# Altium PCB Power Supply.PcbDoc (part 1 of 2)
Units mm, origin at the board's own origin, x right, y up, seen from the top; angles counter-clockwise.
Board outline 95 x 55 mm, 2 copper layers (Top Layer, Bottom Layer); 70 components, 47 nets, 218 pads, 358 vias.
Unrouted connection lines stored in the file: 83.
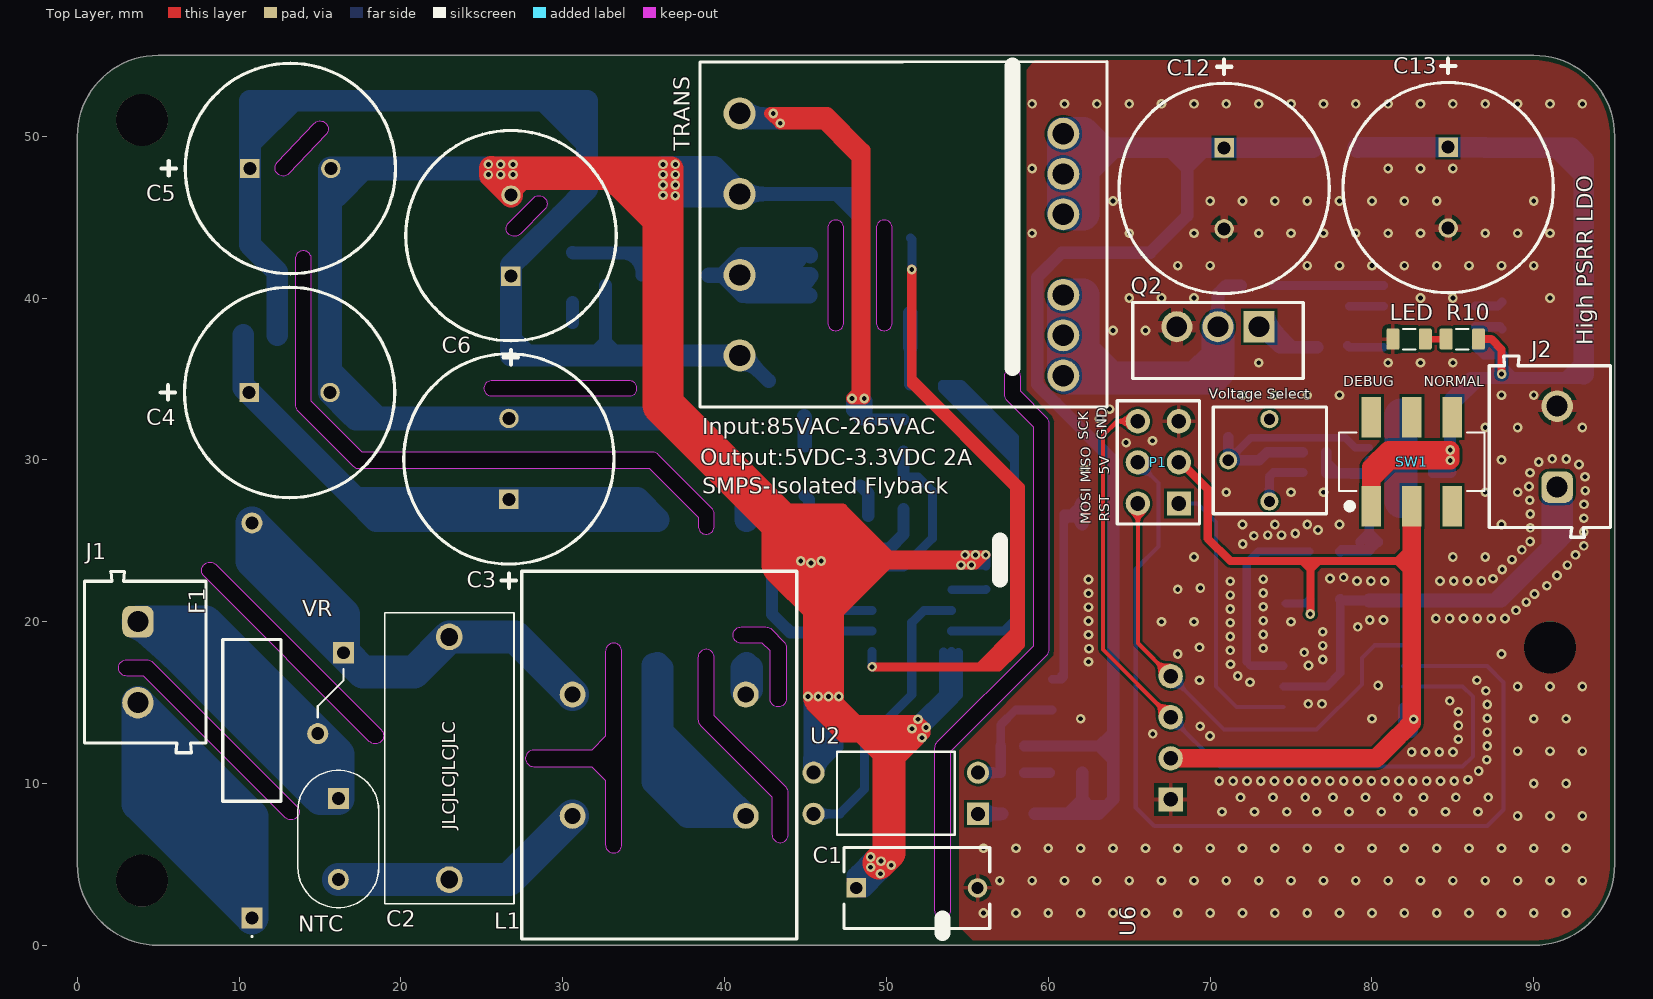
[diagram p0: Top Layer view]
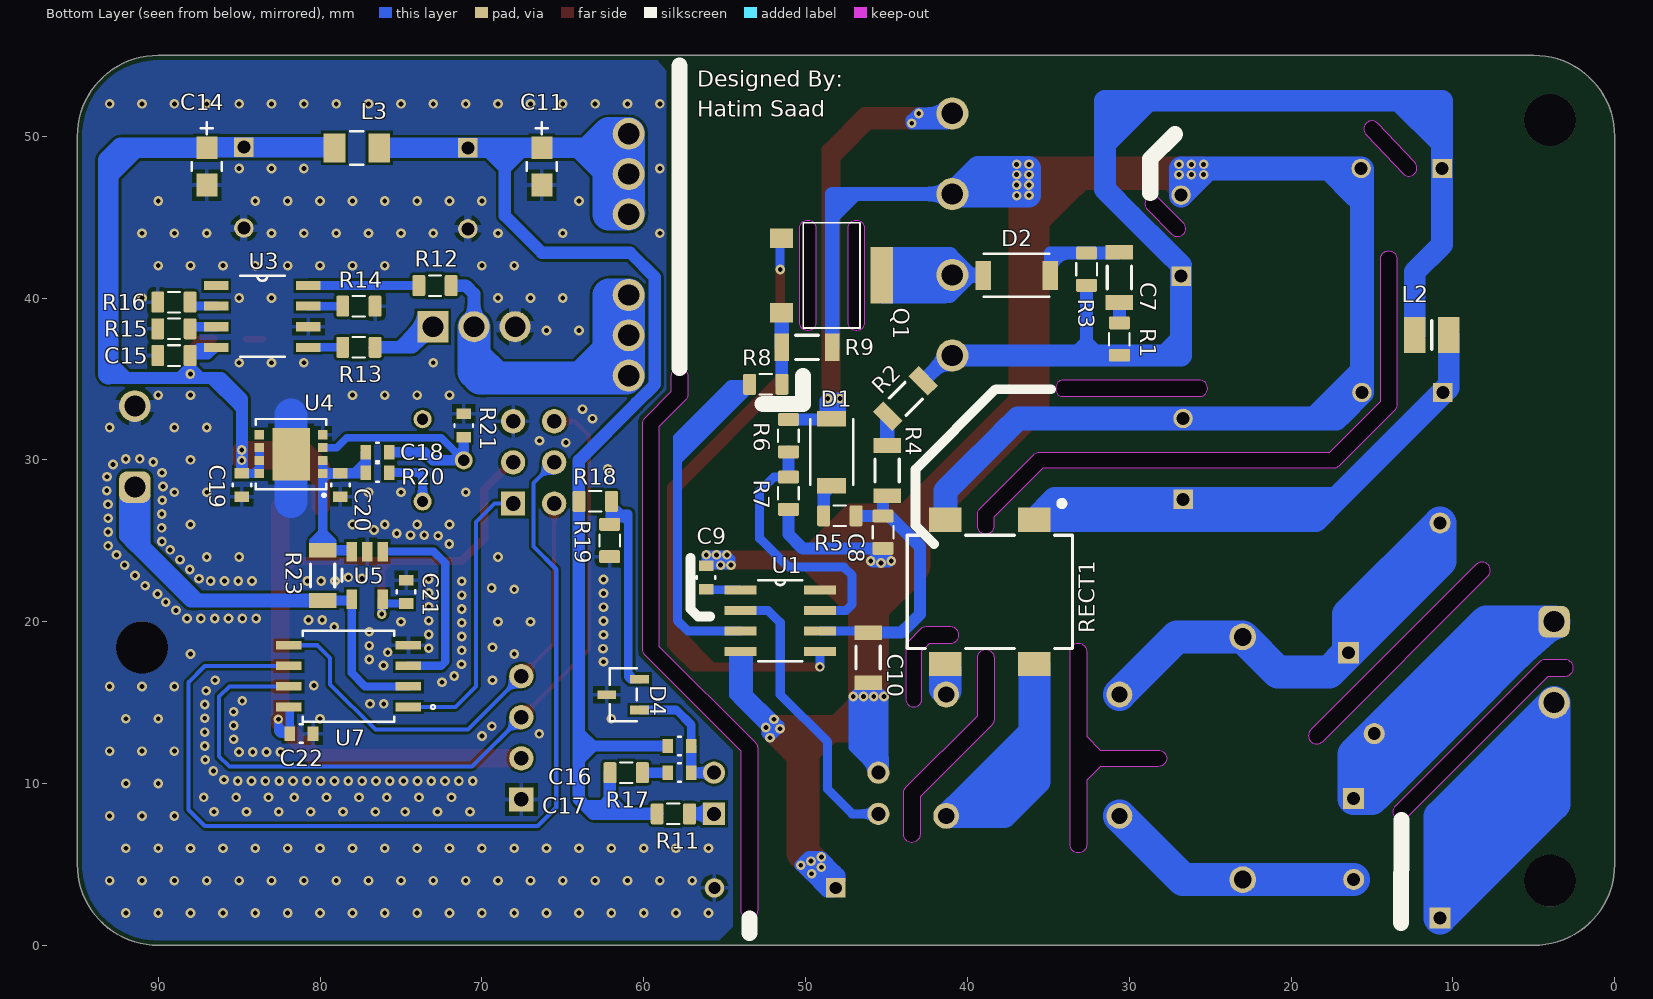
[diagram p1: Bottom Layer view, seen from below]
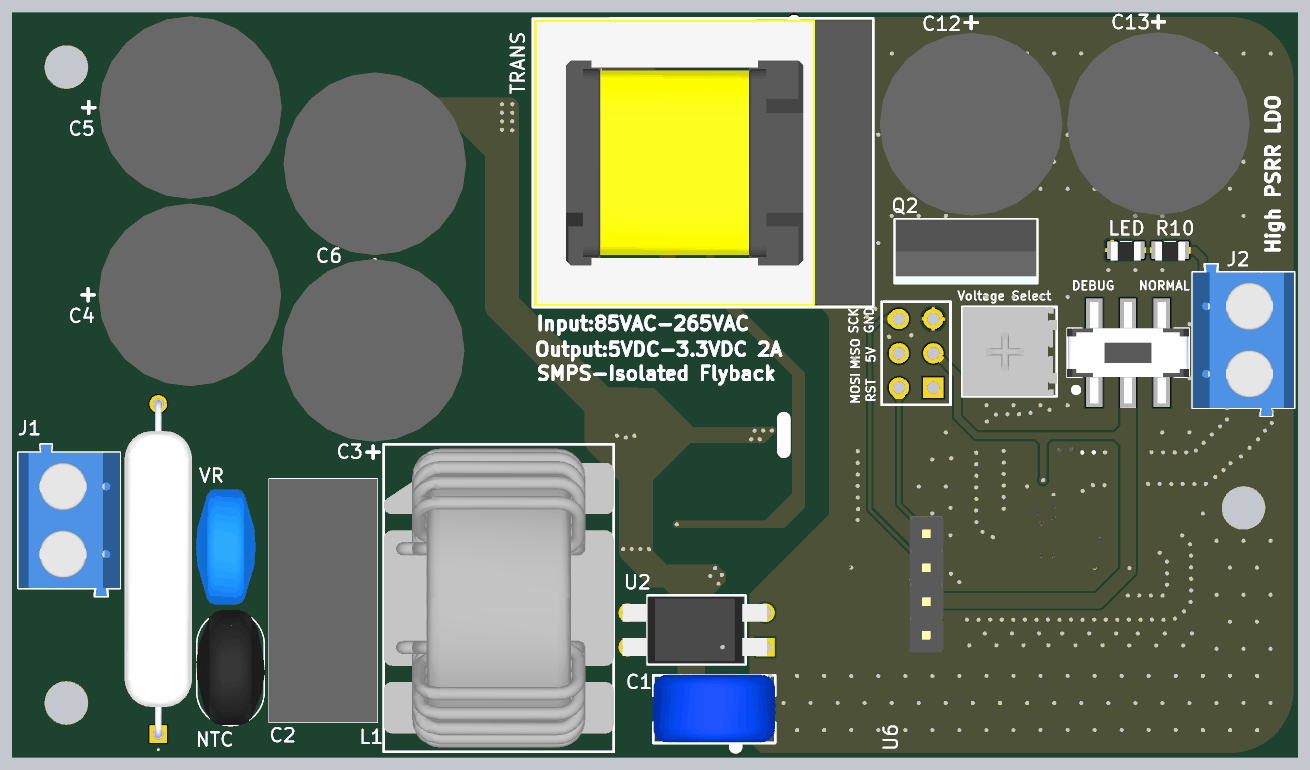
[diagram p3: 3D render of the assembled board from above, using the file's embedded part models]
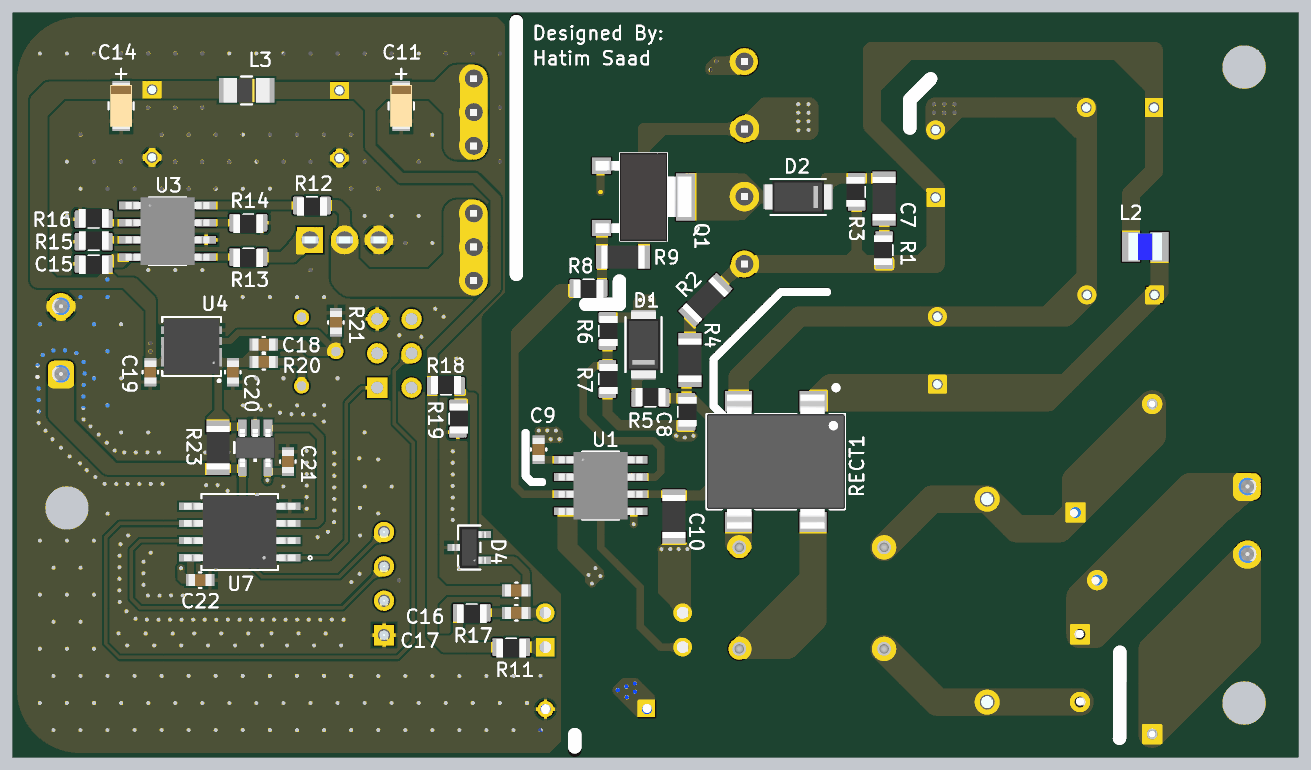
[diagram p4: 3D render of the assembled board from below, using the file's embedded part models]

## Layer stack, top to bottom
Top Solder: solder mask 0.0102, Solder Resist, Dk 3.5
Top Layer: signal copper 0.0356
Dielectric 1: dielectric 0.32, FR-4, Dk 4.8
Bottom Layer: signal copper 0.0356
Bottom Solder: solder mask 0.0102, Solder Resist, Dk 3.5

## Board outline
0,5 0,50 cw(c5,50) 5,55 90,55 cw(c90,50) 95,50 95,5 cw(c90,5) 90,0 5,0 cw(c5,5)
cut-out: 17.045,29.618 ccw(c17.399,29.972) 17.399,29.472 35.353,29.472 38.362,26.463 38.362,25.908 ccw(c38.862,25.908) 39.362,25.908 39.362,26.67 ccw(c38.862,26.67) 39.216,27.024 35.914,30.326 ccw(c35.56,29.972) 35.56,30.472 17.606,30.472 14.47,33.608 14.47,42.418 ccw(c13.97,42.418) 13.47,42.418 13.47,33.401 ccw(c13.97,33.401) 13.616,33.047
cut-out: 3.048,16.645 cw(c3.048,17.145) 3.048,17.645 4.318,17.645 cw(c4.318,17.145) 4.672,17.499 13.562,8.609 cw(c13.208,8.255) 13.708,8.255 cw(c13.208,8.255) 12.854,7.901 4.111,16.645
cut-out: 52.967,2.159 ccw(c53.467,2.159) 53.967,2.159 53.967,11.985 59.917,17.934 ccw(c59.563,18.288) 60.063,18.288 60.063,32.258 ccw(c59.563,32.258) 59.917,32.612 58.285,34.243 58.285,35.179 ccw(c57.785,35.179) 57.285,35.179 57.285,34.036 ccw(c57.785,34.036) 57.431,33.682 59.063,32.051 59.063,18.495 53.113,12.546 ccw(c53.467,12.192) 52.967,12.192
cut-out: 25.654,33.917 cw(c25.654,34.417) 25.654,34.917 34.163,34.917 cw(c34.1,34.481) 34.536,34.417 cw(c34.1,34.353) 34.163,33.917
cut-out: 49.359,38.481 ccw(c49.859,38.481) 50.359,38.481 50.359,44.323 ccw(c49.859,44.323) 49.359,44.323
cut-out: 46.363,38.481 ccw(c46.863,38.481) 47.363,38.481 47.363,44.323 ccw(c46.863,44.323) 46.363,44.323
cut-out: 27.359,43.949 cw(c27.006,44.303) 26.652,44.657 28.176,46.181 cw(c28.53,45.827) 29.03,45.827 cw(c28.53,45.827) 28.883,45.473
cut-out: 13.081,47.688 cw(c12.718,48.033) 12.354,48.377 14.64,50.79 cw(c15.004,50.446) 15.504,50.446 cw(c15.004,50.446) 15.367,50.102
cut-out: 41.021,18.677 cw(c41.021,19.177) 41.021,19.677 42.545,19.677 cw(c42.545,19.177) 42.899,19.531 43.661,18.769 cw(c43.307,18.415) 43.807,18.415 43.807,15.24 cw(c43.307,15.24) 42.807,15.24 42.807,18.208 42.338,18.677
cut-out: 38.503,13.61 42.926,9.187 42.926,6.858 ccw(c43.434,6.858) 43.942,6.858 43.942,9.398 ccw(c43.434,9.398) 43.793,9.758 39.37,14.181 39.37,17.78 ccw(c38.862,17.78) 38.354,17.78 38.354,13.97 ccw(c38.862,13.97)
cut-out: 28.194,11.049 31.793,11.049 32.639,10.203 32.639,6.223 ccw(c33.147,6.223) 33.655,6.223 33.655,18.161 ccw(c33.147,18.161) 32.639,18.161 32.639,12.911 31.793,12.065 28.194,12.065 ccw(c28.194,11.557)
cut-out: 18.056,12.595 7.832,22.818 cw(c8.191,23.177) 8.551,23.537 18.774,13.313 cw(c18.415,12.954) 18.923,12.954 cw(c18.415,12.954)

## Design rules (kind name [scope] priority, off if disabled: settings)
BoardOutlineClearance [All] p1: gap=0.3 ignorepadtopadclearanceinfootprint=FALSE
Clearance [All] p1: gap=0.3 ignorepadtopadclearanceinfootprint=TRUE except(0.127: Track-Track SMDPad-SMDPad; 0.152: Arc-Poly Track-SMDPad Track-THPad Track-Poly SMDPad-Poly THPad-Poly Via-Fill Via-Poly Fill-Poly Poly-Poly Poly-Region Poly-Text Poly-Hole; 0.254: Track-Via Via-Via; 0.5: THPad-THPad)
FabricationTestpoint [All] p1: side=3 testpointundercomponent=TRUE minsize=1.016 maxsize=2.54 preferedsize=1.524 minholesize=0 maxholesize=1.016 preferedholesize=0.813 testpointgrid=0.025 allowsidetop=TRUE allowsidebottom=TRUE usegrid=TRUE gridtolerance=0 boardedgeclearance=0.3
Height [All] p1: minheight=0 maxheight=50 prefheight=12.7
HoleSize [All] p1: absolutevalues=TRUE maxlimit=6.3 minlimit=0.3 maxpercent=80.000 minpercent=20.000
PolygonConnect [All] p1: thpad.connectstyle=Relief thpad.reliefconductorwidth=0.254 thpad.reliefentries=4 thpad.polygonreliefangle="90 Angle" thpad.airgapwidth=0.254 smdpad.connectstyle=Relief smdpad.reliefconductorwidth=0.254 smdpad.reliefentries=4 smdpad.polygonreliefangle="90 Angle" smdpad.airgapwidth=0.254 via.connectstyle=Direct via.reliefconductorwidth=0.254 via.reliefentries=4 via.polygonreliefangle="90 Angle" via.airgapwidth=0.254
RoutingVias [All] p1: holewidth=0.711 width=1.27 viastyle="Through Hole" minholewidth=0.3 minwidth=0.5 maxholewidth=0.711 maxwidth=1.27
SolderMaskExpansion [All] p1: expansion=0.102 istentingtop=FALSE useseparateexpansions=TRUE expansionbottom=0.102 istentingbottom=FALSE
UnRoutedNet [All] p1: checkbadconnections=TRUE
Width [All] p1: maxlimit=15 minlimit=0.127 preferedwidth=0.254
26 further rules are at their usual default settings.

## Classes and differential pairs
component class "Voltage Regulator": "5V <-> 3.3V" C18 C19 C20 R20 R21 U4
component class System: C1
component class "Step-down Transformer": TRANS U2
component class "SMPS Output": C11 C12 C13 C14 C15 C16 C17 D4 L3 LED Q2 R10 R11 R12 R13 R14 R15 R16 R17 R18 R19 U3
component class Output: C21 C22 J2 P1 R23 SW1 U5 U6 U7
component class Input: F1 J1 NTC VR
component class Controller: C3 C4 C5 C6 C7 C8 C9 C10 D1 D2 L2 Q1 R1 R2 R3 R4 R5 R6 R7 R8 R9 U1
component class "Common Mode Noise": C2 L1
component class AC/DC: RECT1

## Components (designator, comment, footprint, x,y, rotation, side; value= is the part's Value field where it differs from the comment)
C1 "2200pF" C927U222MYWDBA7317 48.133,3.55 r0 top
C2 "470nF" 890324025039CS 22.987,4.064 r90 top
C3 "4.7UF" "Alum Radial Cap 5mm" 26.67,27.559 r90 top
C4 "4.7UF" "Alum Radial Cap 5mm" 10.621,34.163 r0 top
C5 "4.7UF" "Alum Radial Cap 5mm" 10.668,48.006 r0 top
C6 "4.7UF" "Alum Radial Cap 5mm" 26.797,41.355 r90 top
C7 "68 pF" "Cap 1206" 30.607,41.275 r270 bottom
C8 "22UF" "Res 0805"#1 45.212,25.527 r90 bottom
C9 "1.8 nF" "Cap 0603" 56.147,22.733 r270 bottom
C10 "100 nF" "Cap 1206" 46.137,17.78 r90 bottom
C11 "1UF" "CAP TANTALUM 1206" 66.294,48.133 r270 bottom
C12 "270UF" "Alum Radial Cap 5mm" 70.866,49.276 r270 top
C13 "270UF" "Alum Radial Cap 5mm" 84.709,49.323 r270 top
C14 "1UF" "CAP TANTALUM 1206" 86.995,48.133 r270 bottom
C15 "0.68 UF" "Res 0805"#1 89.027,36.449 r180 bottom
C16 "1000 pF" "Cap 0603" 57.785,10.668 r180 bottom
C17 "1000 pF" "Cap 0603" 57.785,12.319 r180 bottom
C18 "470nF" "Cap 0603" 76.454,30.48 r0 bottom
C19 "10UF" "Cap 0603" 84.836,28.448 r90 bottom
C20 "10UF" "Cap 0603" 78.74,28.448 r90 bottom
C21 "0.1UF" "Cap 0603" 74.676,21.844 r270 bottom
C22 "0.1UF" "Cap 0603" 81.153,13.081 r0 bottom
D1 "600V 2A" FLAT_SMT 48.387,30.48 r270 bottom
D2 "1KV 0.5A" FLAT_SMT 36.957,41.402 r180 bottom
D4 "TL431AQDBZR,215" SOT23(TO-236AB)_NEX 61.265,15.494 r90 bottom
F1 "250V 2.5A" C310T-SC-2-5-R-TR1 10.795,1.7 r90 top
J1 "250VAC" 691102710002 3.75,20 r270 top
J2 "OUT" 691102710002 91.44,28.321 r90 top
L1 "1mH" 744823601 30.607,15.501 r270 top
L2 "680nH" "IND 1008" 11.303,37.719 r0 bottom
L3 "2512061517Y3" "IND 1206" 77.724,49.276 r0 bottom
LED "150080GS75000" "Res 0805"#2 82.296,37.465 r0 top (schematic designator D3)
NTC "230V 2A" B57153S0100M051 16.129,9.074 r270 top (schematic designator NTC1)
P1 "USBasp" HDR2X3_CEN 68.072,27.305 r90 top
Q1 "IPN70R2K0P7SATMA1" SOT-223-3 48.387,41.402 r270 bottom
Q2 "IRFZ24NPBF" TO-220-3 73.025,38.227 r180 top
R1 "698 Ohms" "Res 0805"#1 30.607,37.465 r270 bottom
R2 "2.05 MOhms" "RES 1206" 43.815,33.782 r135 bottom
R3 "147 KOhms" "Res 0805"#1 32.639,41.783 r270 bottom
R4 "2.05 MOhms" "RES 1206" 44.958,29.337 r90 bottom
R5 "3.09 Ohms" "Res 0805"#1 47.879,26.543 r0 bottom
R6 "88.7 KOhms" "Res 0805"#1 51.054,31.496 r90 bottom
R7 "22 KOhms" "Res 0805"#1 51.054,27.94 r90 bottom
R8 "1.91 KOhms" "Res 0805"#1 52.451,34.671 r180 bottom
R9 "1.2 Ohms" "RES 1206" 49.911,36.957 r0 bottom
R10 "100 Ohm" "Res 0805"#2 85.582,37.465 r0 top
R11 "64.9" "Res 0805"#1 58.166,8.128 r180 bottom
R12 "10 Ohm" "Res 0805"#1 72.898,40.767 r180 bottom
R13 "6.19" "Res 0805"#1 77.597,36.957 r180 bottom
R14 "100" "Res 0805"#1 77.597,39.497 r180 bottom
R15 "133K" "Res 0805"#1 89.027,38.1 r0 bottom
R16 "196K" "Res 0805"#1 89.027,39.751 r0 bottom
R17 "1K" "Res 0805"#1 61.087,10.668 r180 bottom
R18 "5.62K" "Res 0805"#1 62.992,27.432 r0 bottom
R19 "5K" "Res 0805"#1 62.103,25.019 r90 bottom
R20 "16.5K" "Res 0603" 76.454,29.21 r0 bottom
R21 "2.94K" "Res 0603" 71.12,32.131 r90 bottom
R23 "10m" "Cap 1206" 79.837,22.861 r270 bottom
RECT1 "1000V 5A" HBS510-HF 38.608,21.844 r180 bottom
SW1 "DPDT" JS2020 82.463,29.889 r0 top
TRANS "750343109" 750343109 50.927,43.307 r0 top (schematic designator TRANS1)
U1 "UCC28600" UCC28600 51.562,20.066 r180 bottom
U2 "VO617A-4X016" VO617A-4X016 55.657,8.128 r180 top
U3 "UCC24610DR" SOIC-8 83.566,38.862 r180 bottom
U4 "LD39200DPUR" DFN-8 81.788,30.353 r0 bottom
U5 "INA180A3IDBVR" SOT-23-5 77.089,22.86 r270 bottom
U6 "OLED" OLED 67.564,9.017 r90 top
U7 "ATTINY85-20SU" "SOIC 8 ATTINY" 78.232,16.637 r0 bottom
"Voltage Select" "POT 10K" 3362P_1 77.19,29.972 r90 top (schematic designator R22)
VR "275VAC" B72307S0271K101 16.459,18.081 r270 top (schematic designator VR1)

## Footprints (in the part's own frame and the unit in brackets; to place one, negate y for a bottom-side part, rotate by r counter-clockwise, add the part's x,y. Pads: shape width x height; smd on the part's side, far side on the other; paste and mask are expansions set on the pad)
3362P_1 [mm]
  round 1.12 hole 0.69: 1(-2.54,3.53) 2(0,6.07) 3(2.54,3.53)
  silkscreen extent -3.3,0 3.3,6.99, body extent -3.3,-0.03 3.3,6.96, height 4.74
744823601 [mm]
  round 1.6 hole 1: 1(0,0) 2(0,10.7) 3(7.5,10.7) 4(7.5,0)
  silkscreen extent -7.62,-3.15 15.11,13.85, body extent -7.3,-3.15 14.8,13.85, height 26.51
750343109 [mm]
  round 1.98 hole 1.32: 1(-10,8.1) 3(-10,3.12) 4(-10,-1.88) 6(-10,-6.86) 7(10,-8.1) 8(10,-5.61) 9(10,-3.12) 11(10,1.87) 12(10,4.36) 13(10,6.85)
  silkscreen extent -12.45,-10.03 12.7,11.3, body extent -12.32,-9.94 12.58,11.18, height 15.72
691102710002 [mm]
  rrect50% 1.95x1.95 hole 1.3: 1(0,0)
  round 1.95 hole 1.3: 2(5,0)
  silkscreen extent -3.1,-3.3 8.1,4.2, body extent -3.1,-3.3 8.1,4.2, height 9.96
890324025039CS [mm]
  round 1.65 hole 1.1: 1(0,0) 2(15,0)
  silkscreen extent -1.5,-4 16.5,4, body extent -1.5,-4 16.5,4, height 14.6
"Alum Radial Cap 5mm" [mm]
  rect 1.2x1.2 / inner round 1.2 / far side rect 1.2x1.2 hole 0.8: 1(0,0)
  round 1.2 hole 0.8: 2(5,0)
  silkscreen extent -5.46,-6.5 9,6.5, body extent -4.25,-6.75 9.25,6.75, height 21.5
B57153S0100M051 [mm]
  rect 1.3x1.3 / inner round 1.3 / far side rect 1.3x1.3 hole 0.8: 1(0,0)
  round 1.3 hole 0.8: 2(5,0)
  silkscreen extent -1.75,-2.5 6.75,2.5, body extent -1.78,-2.55 6.71,2.55, height 14.71
B72307S0271K101 [mm]
  rect 1.3x1.3 hole 0.8: 1(0,0)
  round 1.3 hole 0.8: 2(5,-1.6)
  silkscreen extent 1,-1.6 4,0, body extent -1.71,-2.88 6.79,1.52, height 14.66
C310T-SC-2-5-R-TR1 [mm]
  rect 1.3x1.3 hole 0.8: 1(0,0)
  round 1.3 hole 0.8: 2(24.4,0)
  silkscreen extent -1.2,-1.8 17.2,1.8, body extent -0.25,-2.5 24.65,2.5, height 5.5
C927U222MYWDBA7317 [mm]
  rect 1.2x1.2 hole 0.75: 1(0,0)
  round 1.2 hole 0.75: 2(7.5,0)
  silkscreen extent -0.75,-2.5 8.25,2.5, body extent -0.75,-2.46 8.25,2.54, height 14.66
"Cap 0603" [mil]
  rect 26x35 smd paste+0 mask+0: 1(-28.5,0) 2(28.5,0)
  silkscreen extent -3,-22 3,22, body extent -34,-17 34,17, height 22
"Cap 1206" [mm] "Chip Resistor, 2-Leads, Body 3.20x1.65mm, IPC Medium Density"
  rect 0.9x1.7 smd: 1(-1.55,0) 2(1.55,0)
  silkscreen extent -0.7,-0.75 0.7,0.75, body extent -1.6,-0.85 1.6,0.85, height 0.56
"CAP TANTALUM 1206" [mm]
  rect 1.405x1.3 smd paste+0 mask+0: 1(-1.15,0) 2(1.15,0)
  silkscreen extent -2.74,-0.93 0.26,0.93, body extent -1.7,-0.8 1.7,0.8, height 1.85
DFN-8 [mil]
  rect 23x22 smd paste+0 mask+0: 1(-77,47.25) 2(-77,15.75) 3(-77,-15.75) 4(-77,-47.25) 5(77,-47.25) 6(77,-15.75) 7(77,15.75) 8(77,47.25)
  rect 91x127 smd paste+0 mask+0: 9(0,0)
  silkscreen extent -86,-86 86,103, body extent -81,-81 81,81, height 39
FLAT_SMT [mil]
  rect 38x71 smd paste+0 mask+0: 1(-81.5,0) 2(81.5,0)
  silkscreen extent -80,-53 80,53, body extent -96,-47 96,47, height 43
HBS510-HF [mm]
  rect 2x1.5 smd: 1(2.75,4.46) 2(2.75,-4.46) 3(-2.75,-4.46) 4(-2.75,4.46)
  silkscreen extent -5.1,-3.5 5.1,5.61, body extent -5.1,-4.95 5.1,4.95, height 1.79
HDR2X3_CEN [mm] "Connector; Header; 3x2 Position"
  rect 1.5x1.5 hole 0.9: 1(0,0)
  round 1.5 hole 0.9: 2(2.54,0) 3(5.08,0) 4(0,2.54) 5(2.54,2.54) 6(5.08,2.54)
  silkscreen extent -1.27,-1.27 6.35,3.81
"IND 1008" [mm]
  rect 1.35x2.2 smd: 1(-1.05,0) 2(1.05,0)
  silkscreen extent 0,-0.9 0,0.9, body extent -1.25,-1 1.25,1, height 1
"IND 1206" [mil]
  rect 53x71 smd paste+0 mask+0: 1(-54.5,0) 2(54.5,0)
  silkscreen extent -16,-40 16,40, body extent -67,-36 67,36, height 51
JS2020 [mm]
  rect 1.2x2.5 smd: 1(-2.5,-2.75) 2(0,-2.75) 3(2.5,-2.75) 4(-2.5,2.75) 5(0,2.75) 6(2.5,2.75)
  silkscreen extent -4.5,-3 4.5,1.8, body extent -4.5,-3.75 4.5,3.75, height 5.51
OLED [mm]
  rect 1.5x1.5 hole 0.9: 1(0,0)
  round 1.5 hole 0.9: 2(2.54,0) 3(5.08,0) 4(7.62,0)
  body extent -8.79,-24.5 16.21,1.5, height 15.08
"Res 0603" [mil]
  rect 26x35 smd paste+0 mask+0: 1(-28.5,0) 2(28.5,0)
  silkscreen extent -3,-22 3,22, body extent -34,-17 34,17, height 22
"Res 0805"#1 [mm] "Chip Resistor 0805 (2012 Metric) Moisture Resistant Thick Film"
  round 0.254 on Mech16: 0(0,0)
  rrect25% 0.8x1.3 smd: 1(-1,0) 2(1,0)
  Top Layer pour cut-out: -0.725,0.65 -0.525,0.85 0.525,0.85 0.725,0.65 0.725,-0.65 0.525,-0.85 -0.525,-0.85 -0.725,-0.65
  silkscreen extent -0.38,-0.64 0.38,0.64, body extent -1.1,-0.75 1.1,0.6, height 0.69
"Res 0805"#2 [mm] "Chip Resistor 0805 (2012 Metric) Moisture Resistant Thick Film"
  round 0.254 on Mech15: 0(0,0)
  rrect25% 0.8x1.3 smd: 1(-1,0) 2(1,0)
  Top Layer pour cut-out: -0.725,0.65 -0.525,0.85 0.525,0.85 0.725,0.65 0.725,-0.65 0.525,-0.85 -0.525,-0.85 -0.725,-0.65
  silkscreen extent -0.38,-0.64 0.38,0.64, body extent -1.1,-0.75 1.1,0.6, height 0.69
"RES 1206" [mm] "Chip Resistor, 2-Leads, Body 3.20x1.65mm, IPC Medium Density"
  rect 0.9x1.7 smd: 1(-1.55,0) 2(1.55,0)
  silkscreen extent -0.7,-0.75 0.7,0.75, body extent -1.6,-0.85 1.6,0.85, height 0.56
"SOIC 8 ATTINY" [mil]
  rect 62x21 smd paste+0 mask+0: 1(-145.5,75) 2(-145.5,25) 3(-145.5,-25) 4(-145.5,-75) 5(145.5,-75) 6(145.5,-25) 7(145.5,25) 8(145.5,75)
  silkscreen extent -210,-110 112,110, body extent -163,-106 163,106, height 85
SOIC-8 [mil]
  rect 59.06x22 smd: 1(-112,75) 2(-112,25) 3(-112,-25) 4(-112,-75) 5(112,-75) 6(112,-25) 7(112,25) 8(112,75)
  silkscreen extent -54,-98 54,98, body extent -122,-99 122,99, height 69
SOT23(TO-236AB)_NEX [mil]
  rect 21x46 smd paste+0 mask+0: 1(-37.4,-40) 2(37.4,-40) 3(0,40)
  silkscreen extent -65,-33 64,33, body extent -59,-49 59,49, height 43
SOT-23-5 [mm]
  rect 1.2x0.65 smd paste+0 mask+0.051: 1(-1.475,0.95) 2(-1.475,0) 3(-1.475,-0.95) 4(1.475,-0.95) 5(1.475,0.95)
  silkscreen extent -0.4,-1.55 0.38,-1.55, body extent -1.4,-1.45 1.4,1.45, height 1.2
SOT-223-3 [mm]
  rect 1.2x1.4 smd: 1(-2.3,-3.1) 3(2.3,-3.1)
  rect 3.5x1.4 smd: 2(0,3.1)
  silkscreen extent -3.25,-1.75 3.25,1.75, body extent -3.25,-3.54 3.25,3.54, height 1.6
TO-220-3 [mm]
  rect 1.92x1.92 / inner round 1.92 / far side rect 1.92x1.92 hole 1.28: 1(0,0)
  round 1.92 hole 1.28: 2(2.54,0) 3(5.08,0)
  silkscreen extent -2.73,-1.5 7.81,3.19, body extent -2.67,-1.49 7.75,3.2, height 18.84
UCC28600 [mil]
  rect 78x22 smd: 1(-97,75) 2(-97,25) 3(-97,-25) 4(-97,-75) 5(97,-75) 6(97,-25) 7(97,25) 8(97,75)
  silkscreen extent -54,-98 54,98, body extent -122,-99 122,99, height 69
VO617A-4X016 [mil]
  rect 54x54 / inner round 60 / far side rect 54x54 hole 34 paste-99999 mask+0: 1(0,0)
  round 54 / inner round 60 / far side round 54 hole 34 paste-99999 mask+0: 2(0,-100) 3(400,-100) 4(400,0)
  silkscreen extent 57,-151 343,51, body extent -5,-146 415,46, height 159

## Part data
C1: library part C927U222MYWDBA7317, "Safety Capacitors 400/250V 2200pF Y5U 20% LS=7.5mm", Supplier Part Number 1=80-C927U222MYWDBAP, Supplier 1=Mouser
C2: library part 890324025039CS, "Safety Capacitors WCAP-FTX2 20mm Lead 0.47uF 10% 275VAC", Supplier Part Number 1=710-890324025039CS, Supplier 1=Mouser
C3 C4 C5 C6: library part ESE475M400AH9AA, "Aluminum Electrolytic Capacitors - Radial Leaded 400V 4.7uF 20% 1000Hrs", Supplier Part Number 1=80-ESE475M400AH9AA, Supplier 1=Mouser
C7: library part CC1206JKNPOCBN680, "Multilayer Ceramic Capacitors MLCC - SMD/SMT 1k V 68 pF C0G 1206 5%", Supplier Part Number 1=603-CC126JKNPOCBN680, Supplier 1=Mouser
C8: library part CL21A226MAYNNNE, "Multilayer Ceramic Capacitors MLCC - SMD/SMT 22uF+/-20% 25V X5R 2 0805", Supplier Part Number 1=187-CL21A226MAYNNNE, Supplier 1=Mouser
C9: library part VJ0603Y182KXACW1BC, "Multilayer Ceramic Capacitors MLCC - SMD/SMT 0603 1800pF 50volts X7R 10%", Supplier Part Number 1=77-VJ0603Y182KXACBC, Supplier 1=Mouser
C10: library part CGA5L4X7T2W104M160AA, "Multilayer Ceramic Capacitors MLCC - SMD/SMT CGA 1206 450V 0.1uF X7T 20% AEC-Q200", Supplier Part Number 1=810-CGA5L4X7T2W104MA, Supplier 1=Mouser
C11 C14: library part T491A105K010AT, "Tantalum Capacitors - Solid SMD 10v 1uF 1206 10% ESR=10Ohms", Supplier Part Number 1=80-T491A105K010AT, Supplier 1=Mouser
C12 C13: library part ESY277M050AH4AA, "Aluminum Electrolytic Capacitors - Radial Leaded 50V 270uF 105C 4k Hour Radial", Supplier Part Number 1=80-ESY277M050AH4AA, Supplier 1=Mouser
C15: library part C0805C684K5RACAUTO7210, "Multilayer Ceramic Capacitors MLCC - SMD/SMT 50V 0.68uF X7R 0805 10% AEC-Q200", Supplier Part Number 1=80-C0805C684K5RAUTO7, Supplier 1=Mouser
C16 C17: library part C0603C102K1RAC7411, "Multilayer Ceramic Capacitors MLCC - SMD/SMT 100V 1000pF X7R 0603 10%", Supplier Part Number 1=80-C0603C102K1RLR, Supplier 1=Mouser
C18: library part CL10B474KO8NNND, "Multilayer Ceramic Capacitors MLCC - SMD/SMT 470nF+/-10% 16V X7R 0603", Supplier Part Number 1=187-CL10B474KO8NNND, Supplier 1=Mouser
C19 C20: library part CL10A106KP8NNWC, "Multilayer Ceramic Capacitors MLCC - SMD/SMT X5R, 10uF, +/-10%, 10v, 0603", Supplier Part Number 1=187-CL10A106KP8NNWC, Supplier 1=Mouser
C21 C22: library part C0603C104K3RAC, "Multilayer Ceramic Capacitors MLCC - SMD/SMT 25V 0.1uF X7R 0603 10%", Supplier Part Number 1=80-C0603C104K3RAC, Supplier 1=Mouser
D1: library part CMF01(TE12L,Q,M), "Diodes - General Purpose, Power, Switching 600V 2A M-FLAT", Supplier Part Number 1=757-CMF01TE12LQM, Supplier 1=Mouser
D2: library part CMF05(TE12L,Q,M), "Rectifiers Super Fast Diode 1000V 0.5A 100ns", Supplier Part Number 1=757-CMF05TE12LQM, Supplier 1=Mouser
D4: "Shunt Voltage Reference IC Adjustable 2.495V 36 VV ±1% 100 mA TO-236AB", Supplier Part Number 1=771-TL431AQDBZR215, Supplier 1=Mouser
F1: library part C310T-SC-2-5-R-TR1, "Cartridge Fuses 2.5A 250V high I2t ceramic", Supplier Part Number 1=504-C310T-SC25RTR1, Supplier 1=Mouser
J1 J2: library part 691102710002, "Fixed Terminal Blocks WR-TBL 300VAC 15A 2P Straight", Supplier Part Number 1=710-691102710002, Supplier 1=Mouser
L1: library part 744823601, "Common Mode Chokes / Filters WE-CMB Choke Type M 1mH 6A 13mOhm", Supplier Part Number 1=710-744823601, Supplier 1=Mouser
L2: library part 744383230068, "Power Inductors - Leaded WE-MAPI 680nH 3.1A DCR=60mOhms AECQ200", Supplier Part Number 1=710-744383230068, Supplier 1=Mouser
L3: "Ferrite Beads MULTILAYER CHIP BEAD Z=150 OHM@100MHz 25", Supplier Part Number 1=623-2512061517Y3, Supplier 1=Mouser
LED: "Standard LEDs - SMD WL-SMCW SMDMono TpVw Waterclr 0805 Green", Supplier Part Number 1=710-150080GS75000, Supplier 1=Mouser
NTC: library part B57153S0100M051, "Inrush Current Limiters S 153/10 M51", Supplier Part Number 1=871-B57153S0100M051, Supplier 1=Mouser
P1: library part "Header 3X2A", "Header, 3-Pin, Dual row", LatestRevisionDate=17-Jul-2002, LatestRevisionNote="Re-released for DXP Platform.", Publisher="Altium Limited"
Q1: "MOSFET CONSUMER 700V 3A 1.64Ohms", Supplier Part Number 1=726-IPN70R2K0P7SATM1, Supplier 1=Mouser
Q2: "MOSFET MOSFT 55V 17A 70mOhm 13.3nC", Supplier Part Number 1=942-IRFZ24NPBF, Supplier 1=Mouser
R1: library part RC0805FR-07698RL, "Thick Film Resistors - SMD 698 Ohms 125 mW 0805 1%", Supplier Part Number 1=603-RC0805FR-07698RL, Supplier 1=Mouser
R2 R4: library part RC1206FR-072M05L, "Thick Film Resistors - SMD 2.05 MOhms 250 mW 1206 1%", Supplier Part Number 1=603-RC1206FR-072M05L, Supplier 1=Mouser
R3: library part ERJ-P06F1473V, "Thick Film Resistors - SMD 0805 147Kohms 0.5W 1% AEC-Q200", Supplier Part Number 1=667-ERJ-P06F1473V, Supplier 1=Mouser
R5: library part RC0805FR-073R09L, "Thick Film Resistors - SMD 3.09Ohms 1/8W 0805 1%", Supplier Part Number 1=603-RC0805FR-073R09L, Supplier 1=Mouser
R6: library part ERA-6AEB8872V, "Thin Film Resistors - SMD 0805 88.7Kohm 0.1% 25ppm", Supplier Part Number 1=667-ERA-6AEB8872V, Supplier 1=Mouser
R7: library part RT0805BRD0722KL, "Thin Film Resistors - SMD 1/8W 22K ohm .1% 25ppm", Supplier Part Number 1=603-RT0805BRD0722KL, Supplier 1=Mouser
R8: library part CR0805-FX-1911ELF, "Thick Film Resistors - SMD 1.91K 1%", Supplier Part Number 1=652-CR0805FX-1911ELF, Supplier 1=Mouser
R9: library part AC1206FR-071R2L, "Thick Film Resistors - SMD 1.2Ohms 1/4W 1206 1% AEC-Q200 Standard Power Version", Supplier Part Number 1=603-AC1206FR-071R2L, Supplier 1=Mouser
R10 R14: library part RC0805FR-07100RL, "Thick Film Resistors - SMD 100 Ohms 125 mW 0805 1%", Supplier Part Number 1=603-RC0805FR-07100RL, Supplier 1=Mouser
R11: library part RT0805FRE0764R9L, "Thin Film Resistors - SMD 1/8W 64.9 ohm 1% 50ppm", Supplier Part Number 1=603-RT0805FRE0764R9L, Supplier 1=Mouser
R12: library part AR0805JR-0710RL, "Thick Film Resistors - SMD 10Ohms 1/8W 0805 5% 5% AEC-Q200", Supplier Part Number 1=603-AR0805JR-0710RL, Supplier 1=Mouser
R13: library part RC0805FR-076R19L, "Thick Film Resistors - SMD 6.19 Ohms 125 mW 0805 1%", Supplier Part Number 1=603-RC0805FR-076R19L, Supplier 1=Mouser
R15: library part RT0805FRE07133KL, "Thin Film Resistors - SMD 1/8W 133K ohm 1% 50ppm", Supplier Part Number 1=603-RT0805FRE07133KL, Supplier 1=Mouser
R16: library part RT0805FRE07196KL, "Thin Film Resistors - SMD 1/8W 196K ohm 1% 50ppm", Supplier Part Number 1=603-RT0805FRE07196KL, Supplier 1=Mouser
R17: library part AC0805FR-7W1KL, "Thick Film Resistors - SMD 1 kOhms 250mW 0805 1 % AEC-Q200 Double Power Version", Supplier Part Number 1=603-AC0805FR-7W1KL, Supplier 1=Mouser
R18: library part RT0805BRD075K62L, "Thin Film Resistors - SMD 1/8W 5.62K ohm .1% 25ppm", Supplier Part Number 1=603-RT0805BRD075K62L, Supplier 1=Mouser
R19: library part CRT0805-BY-5001EAS, "Thin Film Resistors - SMD 5K OHM .1% 25PPM 1/8W", Supplier Part Number 1=652-CRT0805BY5001EAS, Supplier 1=Mouser
R20: library part ERJ-PB3B1652V, "Thick Film Resistors - SMD 0603 Anti-Surge Res. 0.1%, 16.5Koh", Supplier Part Number 1=667-ERJ-PB3B1652V, Supplier 1=Mouser
R21: library part RT0603BRD072K94L, "Thin Film Resistors - SMD 0603 2.94Kohm 0.1% 25ppm", Supplier Part Number 1=603-RT0603BRD072K94L, Supplier 1=Mouser
R23: library part PA1206FRE070R01Z, "Current Sense Resistors - SMD 10mOhms 1/4W 50PPM/C 1 % 1206 AEC-Q200", Supplier Part Number 1=603-1206FRE070R01Z, Supplier 1=Mouser
RECT1: library part HBS510-HF, "Bridge Rectifiers BRIDGE RECTIFIER 1000V 5A", Supplier Part Number 1=750-HBS510-HF, Supplier 1=Mouser
SW1: library part JS202011SCQN, "SWITCH SLIDE DPDT 300MA 6V", Supplier Part Number 1=611-JS202011SCQN, Supplier 1=Mouser
TRANS: "Power Transformers WE-FB SMD Flyback Dialog Semi iW1830", Supplier Part Number 1=710-750343109, Supplier 1=Mouser
U1: library part UCC28600DR, "AC/DC Converters Quasi Res Flyback Green Mode Cntrlr", Supplier Part Number 1=595-UCC28600DR, Supplier 1=Mouser
U2: "Transistor Output Optocouplers RECOMMENDED ALT 782-SFH617A-4X016", Supplier Part Number 1=78-VO617A-4X016, Supplier 1=Mouser
U3: "Gate Drivers Secondary Side Sync Rectifier Controller", Supplier Part Number 1=595-UCC24610DR, Supplier 1=Mouser
U4: "LDO Voltage Regulators 2 A high PSRR ultra low drop linear regulator reverse current protection", Supplier Part Number 1=511-LD39200DPUR, Supplier 1=Mouser
U5: "Current Sense Amplifiers 26V, 350kHz current sense amplifier 5-SOT-23 -40 to 125", Supplier Part Number 1=595-INA180A3IDBVR, Supplier 1=Mouser
U6: library part "0.96 inch OLED", "0.96″ OLED 4pin LCD LED Display Module I2C IIC Communicate – White 128×64"
U7: "8-bit Microcontrollers - MCU AVR 8K FLSH 512B EE 512B SRAM ADC 5V", Supplier Part Number 1=556-ATTINY85-20SU, Supplier 1=Mouser
"Voltage Select": library part 3362H-1-103LF, "Trimmer Resistors - Through Hole 1/4\"SQ 10KOHMS 10% 0.5WATTS", Supplier Part Number 1=652-3362H-1-103LF, Supplier 1=Mouser
VR: library part B72307S0271K101, "Varistors 7mm, 275Vac, 10%, Compact Series", Supplier Part Number 1=871-B72307S0271K101, Supplier 1=Mouser

## Free pads (board coordinates)
  round 3.2 hole 3.2 mask+0: 1(4,4) 1(4,51) 1(91,18.415)

## Via types
v1: diameter 0.6, hole 0.3, Top Layer to Bottom Layer, tented both sides, 358 vias

## Nets (pads, with @x,y where several pads share a name; then routed paths per layer and width w, separated by ;. In a path a pad name is that pad's centre, name@x,y a point inside that pad or via, vN(x,y) a via of type N, cw(c..) or ccw(c..) an arc to the next point about the centre after c; other vN are vias at no path point)
5V3: C13.1 C14.1 C15.2 C19.2 L3.2 R10.2 SW1.1 U3.4 U4.6 U4.7 U4.8 | length 77.3
  Top Layer w0.508: R10.2@86.582,37.465 87.376,37.465 88.011,36.83 v1(88.011,35.306)
  Top Layer w1.143: SW1.1@79.963,27.139 79.963,28.829 ; 81.185,30.246 81.185,30.226 ; 79.963,28.829 79.963,29.544 80.391,29.972 ; 79.963,28.829 81.106,29.972 ; 80.391,29.972 81.106,29.972 ; 80.391,29.972 80.645,30.226 ; 80.645,30.226 81.185,30.226 ; 80.645,30.226 81.026,30.607 v1(84.836,30.607) v1(84.836,29.972) 81.534,29.972 ; 81.106,29.972 81.534,29.972 ; 81.106,29.972 81.185,30.051 81.185,30.226 ; 81.185,30.226 81.28,30.226 81.534,29.972
  Bottom Layer w0.508: 83.744,29.536 84.127,29.153 ; 87.259,36.666 U3.4@86.969,36.957 ; 87.595,36.657 87.295,36.957 ; U3.4@86.969,36.957 87.295,36.957 ; U3.4@86.969,36.957 U3.4@86.411,36.957 86.919,36.449 C15.2@88.027,36.449 87.519,36.957 87.295,36.957
  Bottom Layer w0.559: U4.6@83.744,30.753 U4.7@83.744,29.953 83.744,29.536 U4.8@83.744,29.153 84.127,29.153 84.817,29.153 C19.2@84.836,29.172
  Bottom Layer w0.762: C19.2@84.852,29.251 84.817,29.286 84.817,33.763 86.112,35.058 86.701,35.058 ; 84.993,33.35 86.701,35.058 ; 87.062,35.058 86.701,35.058 ; v1(88.011,35.306) v1@88.011,35.058 ; v1@88.027,35.544 88.027,35.677 ; C15.2@88.027,36.449 88.027,35.677 ; 92.993,36.336 92.993,36.103 91.948,35.058 ; 93.12,35.058 91.948,35.058 ; 86.701,35.058 87.408,35.058 ; 87.408,35.058 v1@88.011,35.058 ; 87.408,35.058 88.027,35.677 ; v1@88.011,35.058 88.646,35.058 ; 88.027,35.677 88.646,35.058 ; 88.646,35.058 91.948,35.058
  Bottom Layer w1.27: L3.2@79.108,49.276 79.155,49.323 C13.1@84.709,49.323 C14.1@86.995,49.323 ; C14.1@86.995,49.283 91.433,49.283 ; 93.091,35.306 93.091,47.625 ; 91.433,49.283 92.322,49.283 93.091,48.514 93.091,47.625 ; 91.433,49.283 93.091,47.625
Aux+: D1.2 R5.2 | length 2.1
  Bottom Layer w0.762: D1.2@48.387,28.41 48.879,27.918 R5.2@48.879,26.543
"Aux+ In": D1.1 R6.2 TRANS.1 | length 58.7
  Top Layer w0.762: 47.825,49.56 47.872,49.513 47.872,49.029 ; 48.215,48.95 48.215,48.686 ; v1@42.827,51.407 v1(43.434,50.8) 46.101,50.8 47.872,49.029 ; v1@42.827,51.407 v1(43.004,51.407) 43.18,51.407 v1@43.208,51.435 ; v1@42.827,51.407 42.855,51.435 v1@43.208,51.435 ; v1@43.208,51.435 46.355,51.435 48.628,49.162 v1(48.628,33.795) v1(47.872,33.795) 48.215,34.138 48.215,48.686 ; 47.872,49.029 48.215,48.686
  Bottom Layer w0.762: 48.26,33.782 D1.1@48.26,32.677 ; R6.2@51.054,32.496 48.441,32.496 D1.1@48.387,32.55 ; D1.1@48.26,32.677 D1.1@48.387,32.55 ; D1.1@48.26,32.677 47.872,33.065 v1(47.872,33.795) v1(48.628,33.795) 48.768,33.655 48.768,32.931 D1.1@48.387,32.55 ; TRANS.1@40.927,51.407 v1(43.004,51.407) 43.434,50.977 v1(43.434,50.8) 41.534,50.8 TRANS.1@40.927,51.407
Current: U5.1 U7.3 | length 12.6
  Bottom Layer w0.508: U7.3@74.536,17.272 72.517,17.272 72.263,17.526 72.263,23.622 72.976,24.335 U5.1@76.139,24.335
FB+: R11.2 U2.1 | length 1.5
  Bottom Layer w0.762: U2.1@55.657,8.128 R11.2@57.166,8.128
FB-: C16.2 C17.2 D4.1 U2.2 | length 7.9
  Bottom Layer w0.533: C17.2@57.061,12.319 57.061,13.627 57.978,14.544 D4.1@60.249,14.544
  Bottom Layer w0.66: U2.2@55.657,10.668 C16.2@57.061,10.668 C17.2@57.061,12.319
Ind: LED.2 R10.1 | length 1.1
  Top Layer w0.406: LED.2@83.512,37.465 R10.1@84.582,37.465
L: C2.1 L1.4 NTC.2 | length 16.1
  Bottom Layer w2.032: NTC.2@16.129,4.074 22.977,4.074 C2.1@22.987,4.064 26.67,4.064 L1.4@30.607,8.001
L_Filt: L1.2 RECT1.3 | length 5.4
  Bottom Layer w1.5: RECT1.3@41.103,17.155 41.103,15.705 L1.2@41.307,15.501 ; RECT1.3@41.358,17.384 41.307,17.333 L1.2@41.307,15.501 ; RECT1.3@41.608,17.16 41.608,15.802 L1.2@41.307,15.501
L_RAW: J1.1 NTC.1 VR.2 | length 62.6
  Bottom Layer w2.032: J1.1@3.75,20 J1.1@4.003,20 ; 7.5,17.326 7.877,17.326 NTC.1@15.955,9.248 ; 15.685,9.942 5.628,20 ; J1.1@4.003,20 5.628,20 ; J1.1@4.003,20 4.546,19.457 4.627,19.457 10.85,13.234 10.851,13.234 11.714,12.37 11.714,12.369 14.836,9.248 ; 5.628,20 7.94,20 VR.2@14.859,13.081 16.129,11.811 NTC.1@16.129,9.074 ; 14.836,9.248 15.01,9.074 NTC.1@16.129,9.074 ; 14.836,9.248 NTC.1@15.955,9.248 ; NTC.1@15.955,9.248 NTC.1@16.129,9.074
MCU_5V: C21.2 C22.2 P1.2 SW1.2 U5.5 U6.2 U7.8 | length 61.5
  Top Layer w0.508: P1.2@68.072,29.845 68.199,29.845 69.85,28.194 69.85,25.146 71.247,23.749 75.692,23.749 ; v1@76.2,20.447 76.2,23.241 ; 82.463,22.86 81.574,23.749 ; 82.463,23.749 81.574,23.749 ; 82.463,24.638 81.574,23.749 ; 75.692,23.749 76.2,23.749 ; 75.692,23.749 76.2,23.241 ; 76.2,23.241 76.2,23.749 ; 76.2,23.241 76.708,23.749 ; 76.2,23.749 76.708,23.749 ; 76.708,23.749 81.574,23.749
  Top Layer w1.143: U6.2@67.564,11.557 80.264,11.557 81.661,12.954 ; 81.788,13.081 82.463,13.756 82.463,22.86 82.463,23.749 82.463,24.638 SW1.2@82.463,27.139
  Bottom Layer w0.508: C21.2@74.676,21.12 75.874,21.12 U5.5@76.139,21.385 76.191,21.333 v1(76.191,20.47)
  Bottom Layer w0.533: U7.8@81.928,14.732 81.877,14.681 C22.2@81.877,13.081 C22.2@82.126,13.081 ; 82.52,13.323 82.278,13.081 ; 82.52,13.475 C22.2@82.126,13.081 ; v1(82.575,13.97) 82.575,13.233 82.423,13.081 82.278,13.081 ; C22.2@82.126,13.081 82.278,13.081